# EAGLE board SampleHolder (EAGLE 5.10)
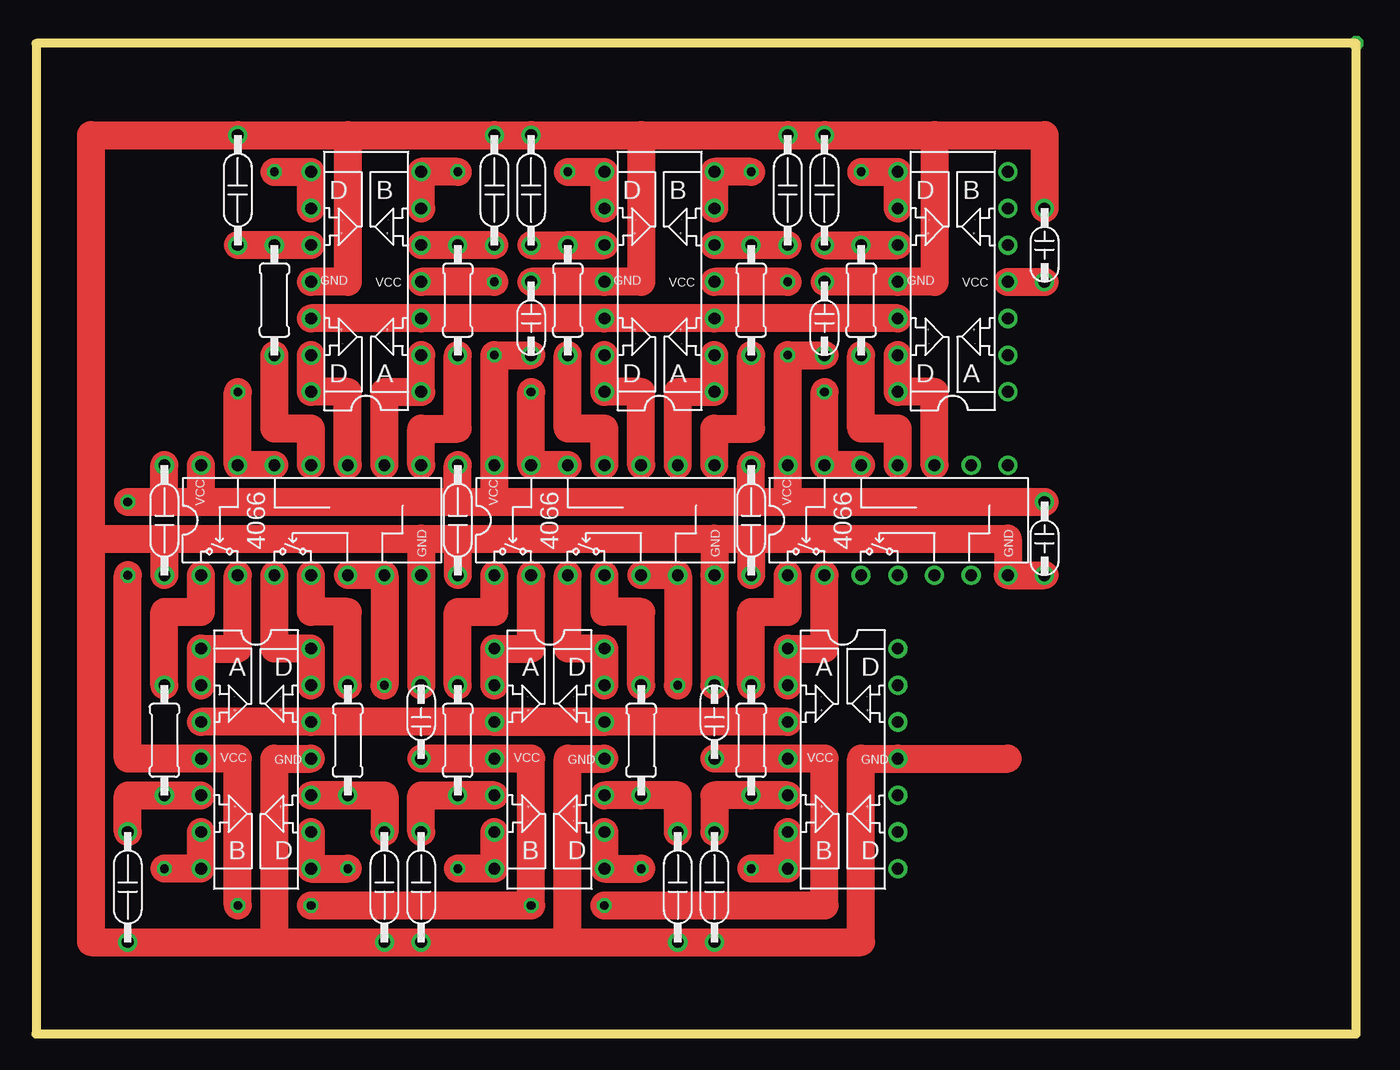
[diagram p0: board, top side]
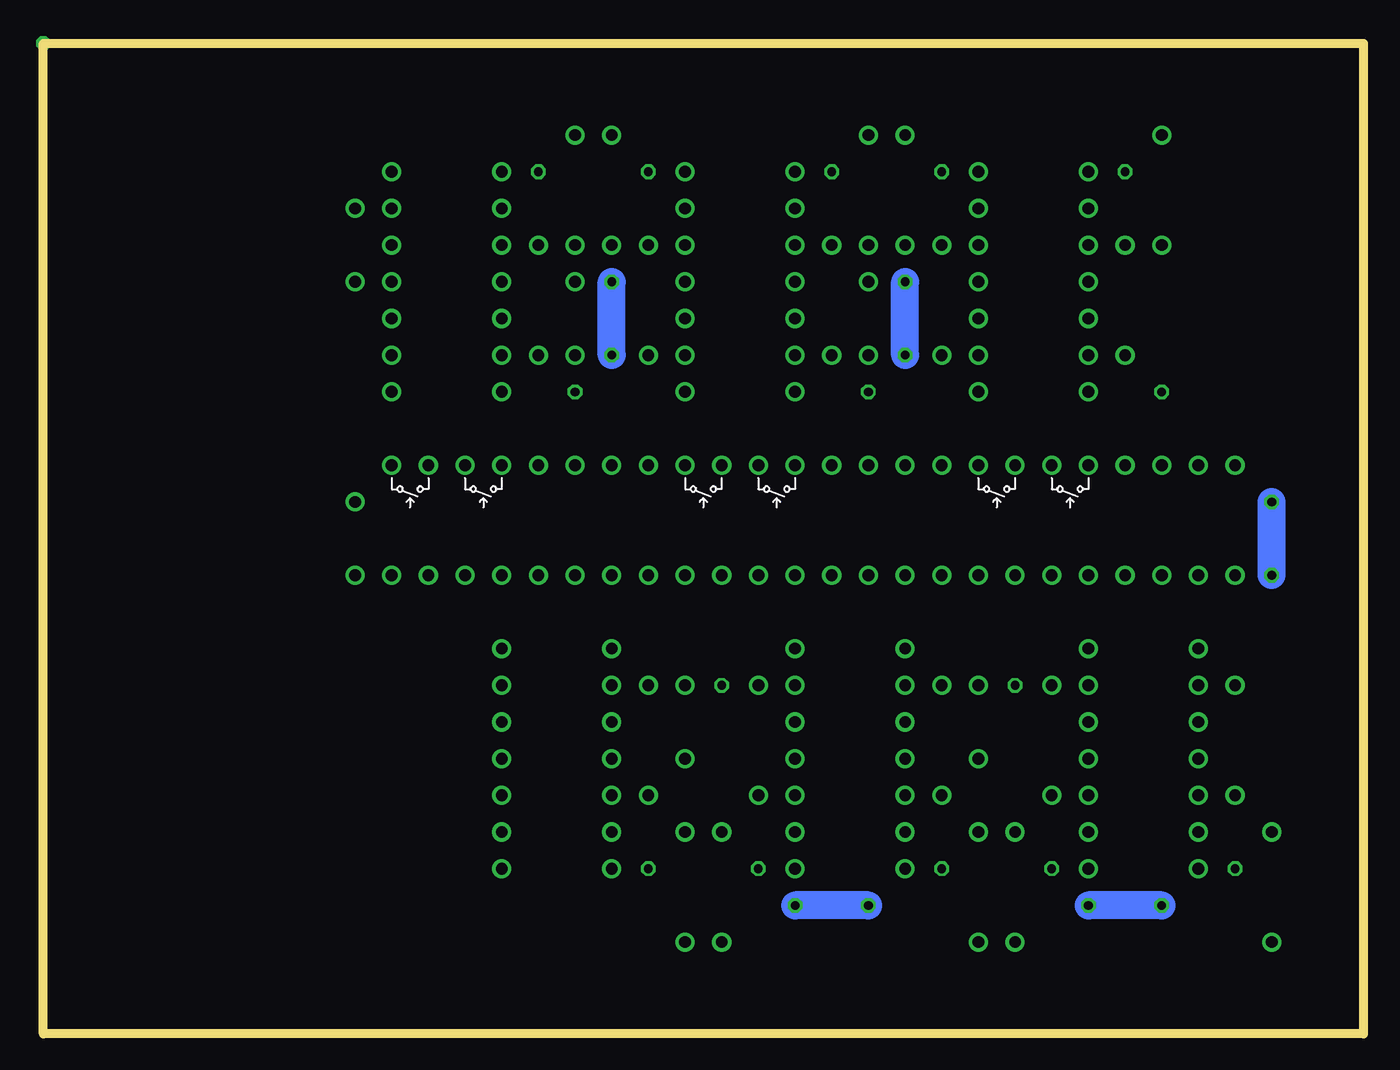
[diagram p1: board, bottom side, seen from below]

Size 91.44 x 68.58 mm. Coordinates in mm from the lower left corner, seen from the top.
Outline: 91.44,0 91.44,68.58 0,68.58 0,0 91.44,0
Copper layers (1*16): Top 0.035mm / dielectric 1.5mm / Bottom 0.035mm
Design rules "default": minimum track width 10mil, minimum drill 24mil, track to track 8mil, track to pad 8mil, pad to pad 8mil, via to via 8mil, smd to smd 8mil, copper to edge 40mil, drill to drill 8mil, minimum pad ring 10mil, minimum via ring 8mil, stop-mask expansion 4mil, vias tented up to drill 0mil, thermal gap 10mil

## Footprints (pad centres in the part's own frame; a part is rotated, then mirrored left to right if it is on the bottom)
SMALL-CAPACITOR = drill 0.813 round: IN1 0,0; IN2 5.08,0
RESISTOR = drill 0.813 round: IN1 -3.81,0; IN2 3.81,0
CAPACITOR = drill 0.813 round: IN1 -2.54,0; IN2 5.08,0
LM324-QUAD-OPAMP = drill 0.813 round: AMINUS -3.81,5.08; AOUT -3.81,7.62; APLUS -3.81,2.54; BMINUS -3.81,-5.08; BOUT -3.81,-7.62; BPLUS -3.81,-2.54; CMINUS 3.81,5.08; COUT 3.81,7.62; CPLUS 3.81,2.54; DMINUS 3.81,-5.08; DOUT 3.81,-7.62; DPLUS 3.81,-2.54; GND 3.81,0; VCC -3.81,0
4066-QUAD-SW = drill 0.813 round: A1 -3.81,7.62; A2 -3.81,2.54; A3 3.81,-5.08; A4 3.81,0; B1 -3.81,5.08; B2 -3.81,0; B3 3.81,-7.62; B4 3.81,-2.54; C1 3.81,5.08; C2 -3.81,-2.54; C3 -3.81,-5.08; C4 3.81,2.54; GND -3.81,-7.62; VCC 3.81,7.62

## Placement (x,y rotation side)
E$1  [SMALL-CAPACITOR]  34.29,52.07 270 top
E$2  [RESISTOR]  57.15,50.8 270 top
E$3  [CAPACITOR]  54.61,57.15 90 top
E$4  [SMALL-CAPACITOR]  54.61,52.07 270 top
E$5  [LM324-QUAD-OPAMP]  55.88,19.05 0 top
E$6  [SMALL-CAPACITOR]  69.85,57.15 270 top
E$7  [RESISTOR]  49.53,20.32 90 top
E$8  [SMALL-CAPACITOR]  69.85,36.83 270 top
E$9  [CAPACITOR]  46.99,11.43 270 top
E$10  [4066-QUAD-SW]  39.37,35.56 90 top
E$11  [LM324-QUAD-OPAMP]  43.18,52.07 180 top
E$12  [RESISTOR]  36.83,50.8 270 top
E$13  [RESISTOR]  49.53,50.8 270 top
E$14  [CAPACITOR]  34.29,57.15 90 top
E$15  [4066-QUAD-SW]  59.69,35.56 90 top
E$16  [LM324-QUAD-OPAMP]  63.5,52.07 180 top
E$17  [CAPACITOR]  52.07,57.15 90 top
E$18  [LM324-QUAD-OPAMP]  35.56,19.05 0 top
E$19  [RESISTOR]  41.91,20.32 90 top
E$20  [RESISTOR]  29.21,20.32 90 top
E$21  [CAPACITOR]  44.45,11.43 270 top
E$22  [CAPACITOR]  26.67,11.43 270 top
E$23  [4066-QUAD-SW]  19.05,35.56 90 top
E$24  [LM324-QUAD-OPAMP]  22.86,52.07 180 top
E$25  [RESISTOR]  16.51,50.8 270 top
E$26  [RESISTOR]  29.21,50.8 270 top
E$27  [CAPACITOR]  13.97,57.15 90 top
E$28  [CAPACITOR]  31.75,57.15 90 top
E$29  [LM324-QUAD-OPAMP]  15.24,19.05 0 top
E$30  [RESISTOR]  21.59,20.32 90 top
E$31  [RESISTOR]  8.89,20.32 90 top
E$32  [CAPACITOR]  24.13,11.43 270 top
E$33  [CAPACITOR]  6.35,11.43 270 top
E$34  [CAPACITOR]  29.21,36.83 270 top
E$35  [CAPACITOR]  49.53,36.83 270 top
E$36  [CAPACITOR]  8.89,36.83 270 top
E$37  [SMALL-CAPACITOR]  46.99,19.05 90 top
E$38  [SMALL-CAPACITOR]  26.67,19.05 90 top

## Library data of the parts
E$1-E$38 = RussellLibrary

## Nets
S$1: E$15.B4 E$16.CMINUS E$16.COUT
S$3: E$11.APLUS E$11.CPLUS E$16.CPLUS E$24.APLUS E$24.CPLUS
S$4: E$16.VCC
S$5: E$2.IN2 E$15.A4
S$6: E$2.IN1 E$3.IN1 E$16.DPLUS
S$7: E$1.IN1 E$3.IN2 E$4.IN1 E$5.GND E$6.IN1 E$8.IN2 E$9.IN2 E$10.GND E$11.GND E$14.IN2 E$15.GND E$16.GND E$17.IN2 E$18.GND E$21.IN2 E$22.IN2 E$23.GND E$24.GND E$27.IN2 E$28.IN2 E$29.GND E$32.IN2 E$33.IN2 E$34.IN2 E$35.IN2 E$36.IN2 E$37.IN2 E$38.IN2
S$8: E$5.AMINUS E$5.AOUT
S$11: E$7.IN2
S$15: E$5.BPLUS E$9.IN1
S$16: E$5.BMINUS E$5.BOUT
S$17: E$10.C2 E$10.C3
S$18: E$10.C1 E$10.C4
S$20: E$1.IN2 E$4.IN2 E$5.VCC E$10.VCC E$11.VCC E$15.VCC E$18.VCC E$23.VCC E$24.VCC E$29.VCC E$34.IN1 E$35.IN1 E$36.IN1 E$37.IN1 E$38.IN1
S$22: E$10.A3 E$11.AMINUS E$11.AOUT
S$23: E$10.B4 E$11.CMINUS E$11.COUT
S$24: E$11.BMINUS E$11.BOUT
S$26: E$10.B3 E$13.IN2
S$27: E$10.A4 E$12.IN2
S$28: E$11.DPLUS E$12.IN1 E$14.IN1
S$30: E$11.BPLUS E$17.IN1
S$32: E$24.BMINUS E$24.BOUT
S$33: E$18.AMINUS E$18.AOUT
S$34: E$18.CMINUS E$18.COUT
S$35: E$16.DMINUS E$16.DOUT
S$36: E$20.IN2
S$37: E$19.IN2
S$39: E$15.C1 E$15.C4
S$40: E$18.DPLUS E$19.IN1 E$21.IN1
S$41: E$18.DMINUS E$18.DOUT
S$44: E$18.BPLUS E$22.IN1
S$46: E$18.BMINUS E$18.BOUT
S$47: E$11.DMINUS E$11.DOUT
S$48: E$23.C2 E$23.C3
S$49: E$23.C1 E$23.C4
S$51: E$24.DMINUS E$24.DOUT
S$53: E$23.A3 E$24.AMINUS E$24.AOUT
S$54: E$23.B4 E$24.CMINUS E$24.COUT
S$56: E$23.B3 E$26.IN2
S$57: E$23.A4 E$25.IN2
S$60: E$24.DPLUS E$25.IN1 E$27.IN1
S$62: E$24.BPLUS E$28.IN1
S$65: E$29.AMINUS E$29.AOUT
S$66: E$29.CMINUS E$29.COUT
S$67: E$5.APLUS E$18.APLUS E$18.CPLUS E$29.APLUS E$29.CPLUS
S$68: E$31.IN2
S$69: E$30.IN2
S$70: E$29.DPLUS E$30.IN1 E$32.IN1
S$71: E$29.DMINUS E$29.DOUT
S$72: E$29.BPLUS E$33.IN1
S$73: E$29.BMINUS E$29.BOUT

## Tracks (layer width: path | path; a pad name or v marks a point on that pad's centre or on a via)
S$1
  Top 1.93: E$16.CMINUS E$16.COUT 62.23,44.45 E$15.B4
S$3
  Top 1.93: E$24.CPLUS E$24.APLUS E$11.CPLUS E$11.APLUS E$16.CPLUS
S$4
  Top 1.93: E$16.VCC 69.85,52.07
S$5
  Top 1.93: E$15.A4 59.69,41.91 57.15,41.91 E$2.IN2
S$6
  Top 1.93: E$2.IN1 E$16.DPLUS E$3.IN1
S$7
  Top 1.93: E$6.IN1 69.85,62.23 62.23,62.23 | 8.89,34.29 E$36.IN2 | 46.99,34.29 E$10.GND E$37.IN2 | 49.53,34.29 67.31,34.29 E$15.GND E$8.IN2 | 46.99,34.29 49.53,34.29 | 26.67,34.29 E$23.GND E$38.IN2 | 29.21,34.29 46.99,34.29 | 26.67,34.29 29.21,34.29 | 29.21,34.29 E$34.IN2 | 49.53,34.29 E$35.IN2 | 8.89,34.29 26.67,34.29 | 36.83,6.35 E$21.IN2 E$9.IN2 57.15,6.35 57.15,19.05 E$5.GND 67.31,19.05 | 36.83,6.35 E$22.IN2 E$32.IN2 16.51,6.35 | 16.51,6.35 E$33.IN2 3.81,6.35 3.81,34.29 | E$29.GND 16.51,19.05 16.51,6.35 | E$18.GND 36.83,19.05 36.83,6.35 | 62.23,62.23 E$3.IN2 E$17.IN2 41.91,62.23 | 41.91,62.23 E$14.IN2 E$28.IN2 21.59,62.23 | 21.59,62.23 E$27.IN2 3.81,62.23 3.81,34.29 | 62.23,62.23 62.23,52.07 E$16.GND E$4.IN1 | 41.91,62.23 41.91,52.07 E$11.GND E$1.IN1 | E$24.GND 21.59,52.07 21.59,62.23 | 3.81,34.29 8.89,34.29
S$8
  Top 1.93: E$5.AMINUS E$5.AOUT 54.61,26.67 54.61,31.75
S$11
  Top 1.93: E$7.IN2 49.53,29.21 52.07,29.21 52.07,31.75
S$15
  Top 1.93: 49.53,16.51 E$5.BPLUS 46.99,16.51 E$9.IN1
S$16  (via drill 0.6)
  Top 1.93: E$5.BMINUS E$5.BOUT v49.53,11.43
S$17  (via drill 0.6)
  Top 1.93: E$10.C2 E$10.C3 v44.45,24.13
S$18  (via drill 0.6)
  Top 1.93: E$10.C4 E$10.C1 v34.29,44.45
S$20  (via drill 0.6)
  Top 1.93: v52.07,52.07 E$11.VCC | E$4.IN2 v52.07,46.99 E$15.VCC 52.07,36.83 | v31.75,52.07 E$24.VCC | E$1.IN2 v31.75,46.99 E$10.VCC 31.75,36.83 | 52.07,36.83 69.85,36.83 | 49.53,36.83 52.07,36.83 | 49.53,36.83 E$35.IN1 | 31.75,36.83 49.53,36.83 | 29.21,36.83 31.75,36.83 | 29.21,36.83 E$34.IN1 | 11.43,36.83 E$23.VCC | 11.43,36.83 29.21,36.83 | 8.89,36.83 11.43,36.83 | 8.89,36.83 E$36.IN1 | E$37.IN1 E$5.VCC 54.61,19.05 54.61,8.89 v39.37,8.89 | v6.35,36.83 8.89,36.83 | E$38.IN1 E$18.VCC 34.29,19.05 v34.29,8.89 v19.05,8.89 | v6.35,31.75 6.35,19.05 E$29.VCC 13.97,19.05 v13.97,8.89
  Bottom 1.93: v52.07,46.99 v52.07,52.07 | v31.75,46.99 v31.75,52.07 | v6.35,31.75 v6.35,36.83 | v34.29,8.89 v39.37,8.89 | v13.97,8.89 v19.05,8.89
S$22
  Top 1.93: E$11.AMINUS E$11.AOUT 44.45,44.45 E$10.A3
S$23
  Top 1.93: E$11.CMINUS E$11.COUT 41.91,44.45 E$10.B4
S$24  (via drill 0.6)
  Top 1.93: E$11.BMINUS E$11.BOUT v49.53,59.69
S$25  (via drill 0.6)
  other vias: 91.44,68.58
S$26
  Top 1.93: E$13.IN2 49.53,41.91 46.99,41.91 E$10.B3
S$27
  Top 1.93: E$10.A4 39.37,41.91 36.83,41.91 E$12.IN2
S$28
  Top 1.93: E$12.IN1 E$11.DPLUS E$14.IN1
S$30
  Top 1.93: 49.53,54.61 E$11.BPLUS E$17.IN1
S$32  (via drill 0.6)
  Top 1.93: E$24.BMINUS E$24.BOUT v29.21,59.69
S$33
  Top 1.93: E$18.AMINUS E$18.AOUT 34.29,26.67 34.29,31.75
S$34
  Top 1.93: E$18.CMINUS E$18.COUT 36.83,26.67 36.83,31.75
S$35  (via drill 0.6)
  Top 1.93: E$16.DMINUS E$16.DOUT v57.15,59.69
S$36
  Top 1.93: E$20.IN2 29.21,29.21 31.75,29.21 31.75,31.75
S$37
  Top 1.93: 39.37,31.75 39.37,29.21 41.91,29.21 E$19.IN2
S$39  (via drill 0.6)
  Top 1.93: E$15.C4 E$15.C1 v54.61,44.45
S$40
  Top 1.93: E$19.IN1 E$18.DPLUS 44.45,16.51 E$21.IN1
S$41  (via drill 0.6)
  Top 1.93: E$18.DMINUS E$18.DOUT v41.91,11.43
S$44
  Top 1.93: 29.21,16.51 E$18.BPLUS 26.67,16.51 E$22.IN1
S$46  (via drill 0.6)
  Top 1.93: E$18.BMINUS E$18.BOUT v29.21,11.43
S$47  (via drill 0.6)
  Top 1.93: E$11.DMINUS E$11.DOUT v36.83,59.69
S$48  (via drill 0.6)
  Top 1.93: E$23.C2 E$23.C3 v24.13,24.13
S$49  (via drill 0.6)
  Top 1.93: E$23.C4 E$23.C1 v13.97,44.45
S$51  (via drill 0.6)
  Top 1.93: E$24.DMINUS E$24.DOUT v16.51,59.69
S$53
  Top 1.93: E$24.AMINUS E$24.AOUT 24.13,44.45 E$23.A3
S$54
  Top 1.93: E$24.CMINUS E$24.COUT 21.59,44.45 E$23.B4
S$56
  Top 1.93: E$26.IN2 29.21,41.91 26.67,41.91 E$23.B3
S$57
  Top 1.93: E$23.A4 19.05,41.91 16.51,41.91 E$25.IN2
S$60
  Top 1.93: E$24.DPLUS E$25.IN1 E$27.IN1
S$62
  Top 1.93: 29.21,54.61 E$24.BPLUS E$28.IN1
S$65
  Top 1.93: E$29.AMINUS E$29.AOUT 13.97,26.67 13.97,31.75
S$66
  Top 1.93: E$29.CMINUS E$29.COUT 16.51,26.67 16.51,31.75
S$67
  Top 1.93: E$29.APLUS E$29.CPLUS E$18.APLUS | E$18.APLUS E$18.CPLUS | E$5.APLUS E$18.APLUS
S$68
  Top 1.93: E$31.IN2 8.89,29.21 11.43,29.21 11.43,31.75
S$69
  Top 1.93: 19.05,31.75 19.05,29.21 21.59,29.21 E$30.IN2
S$70
  Top 1.93: E$30.IN1 E$29.DPLUS 24.13,16.51 E$32.IN1
S$71  (via drill 0.6)
  Top 1.93: E$29.DMINUS E$29.DOUT v21.59,11.43
S$72
  Top 1.93: E$33.IN1 6.35,16.51 E$29.BPLUS
S$73  (via drill 0.6)
  Top 1.93: E$29.BMINUS E$29.BOUT v8.89,11.43